# Altium PCB fcu.PcbDoc
Units mil, origin at the board's own origin, x right, y up, seen from the top; angles counter-clockwise.
Board outline 2000 x 2000 mil, 2 copper layers (Top Layer, Bottom Layer); 67 components, 84 nets, 346 pads, 154 vias.
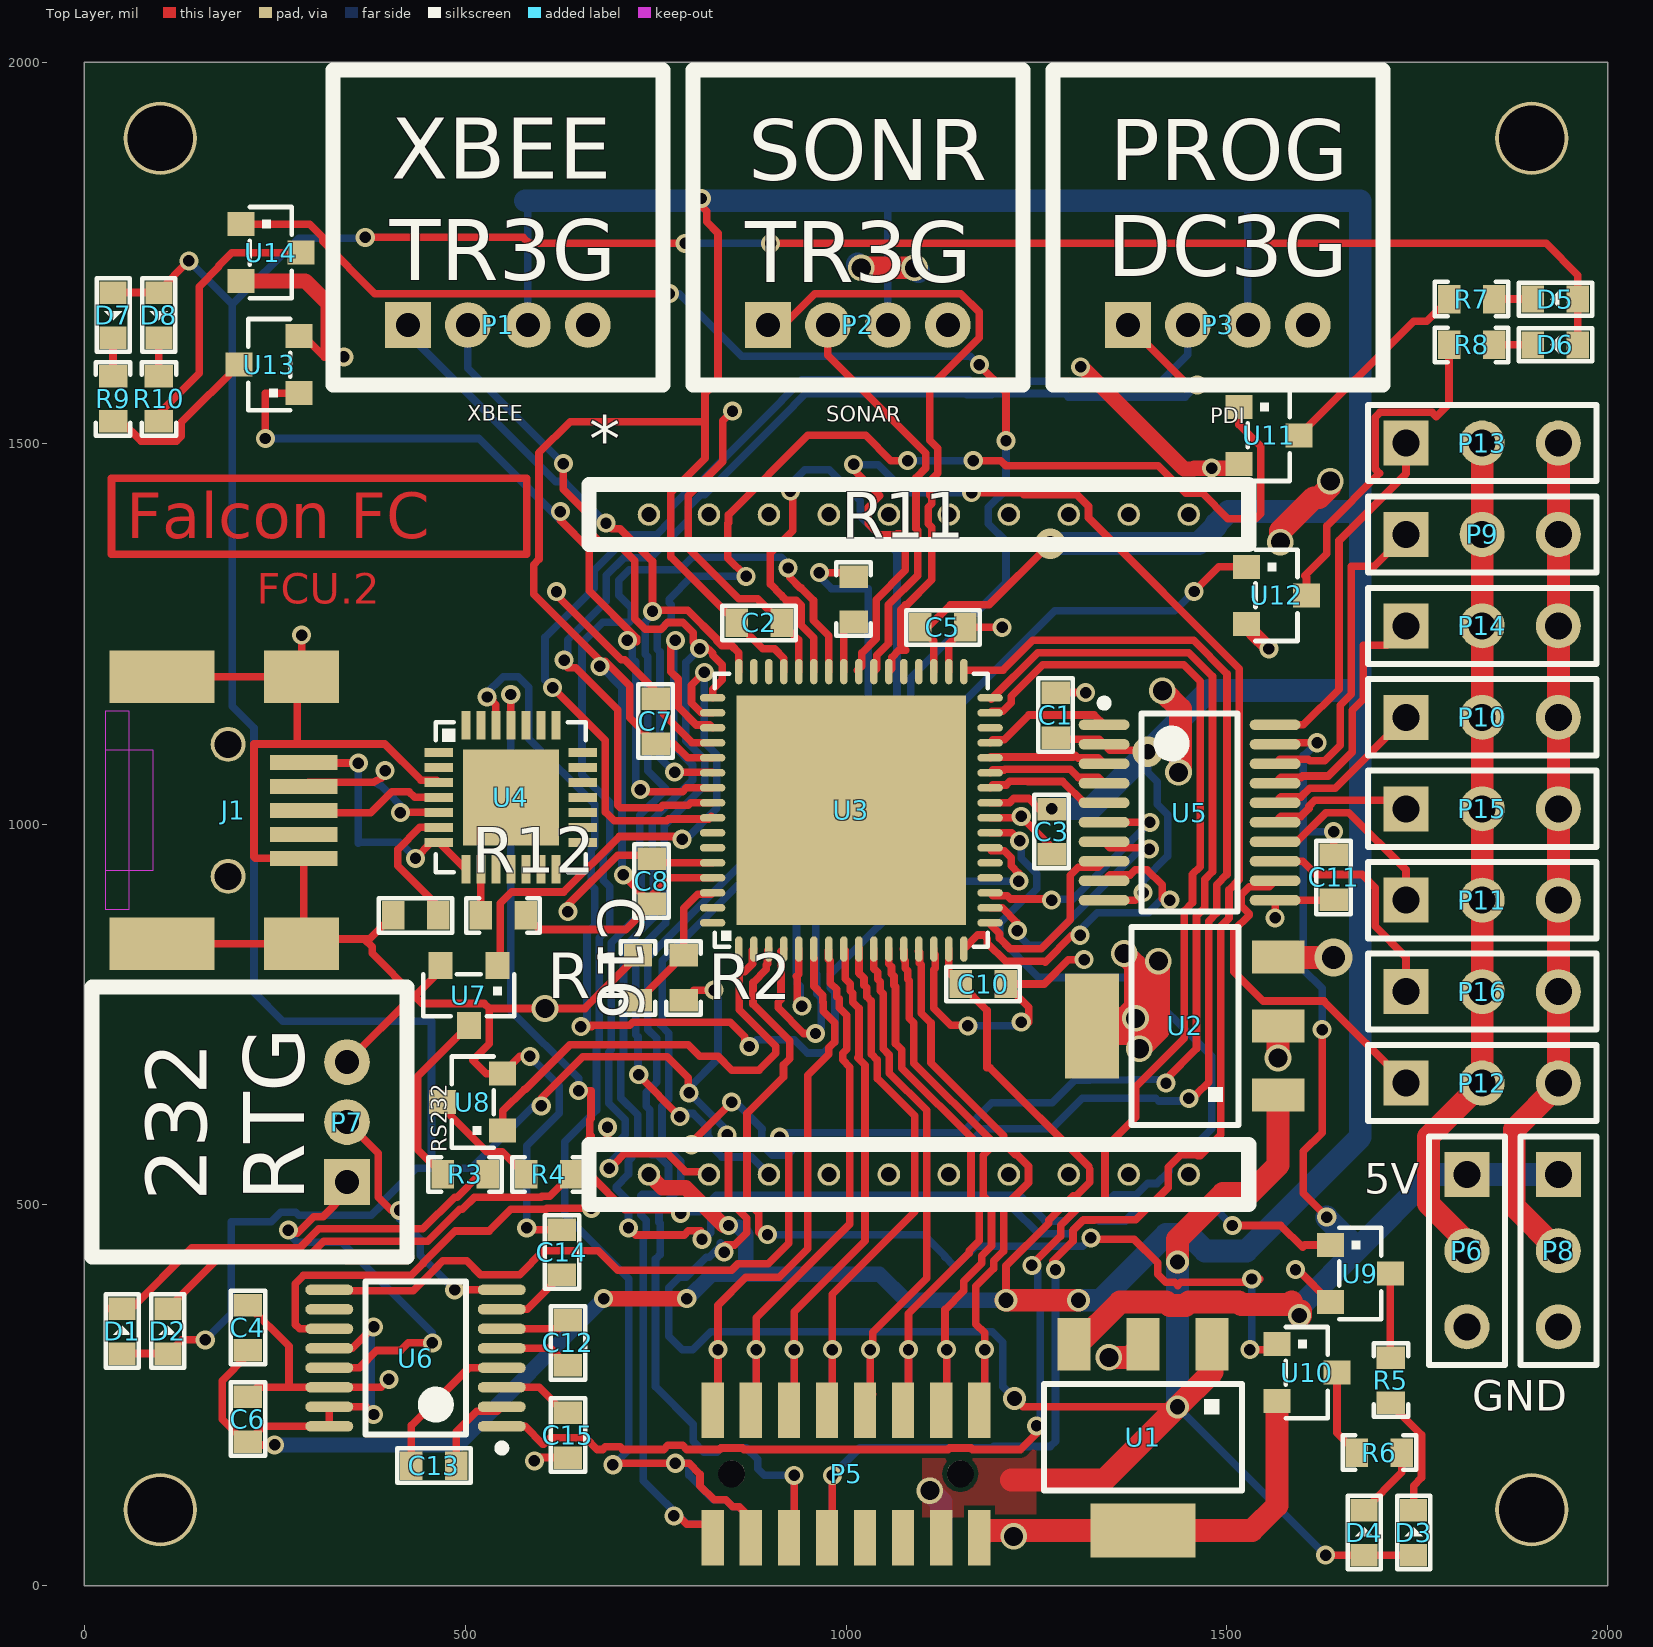
[diagram p0: Top Layer view]
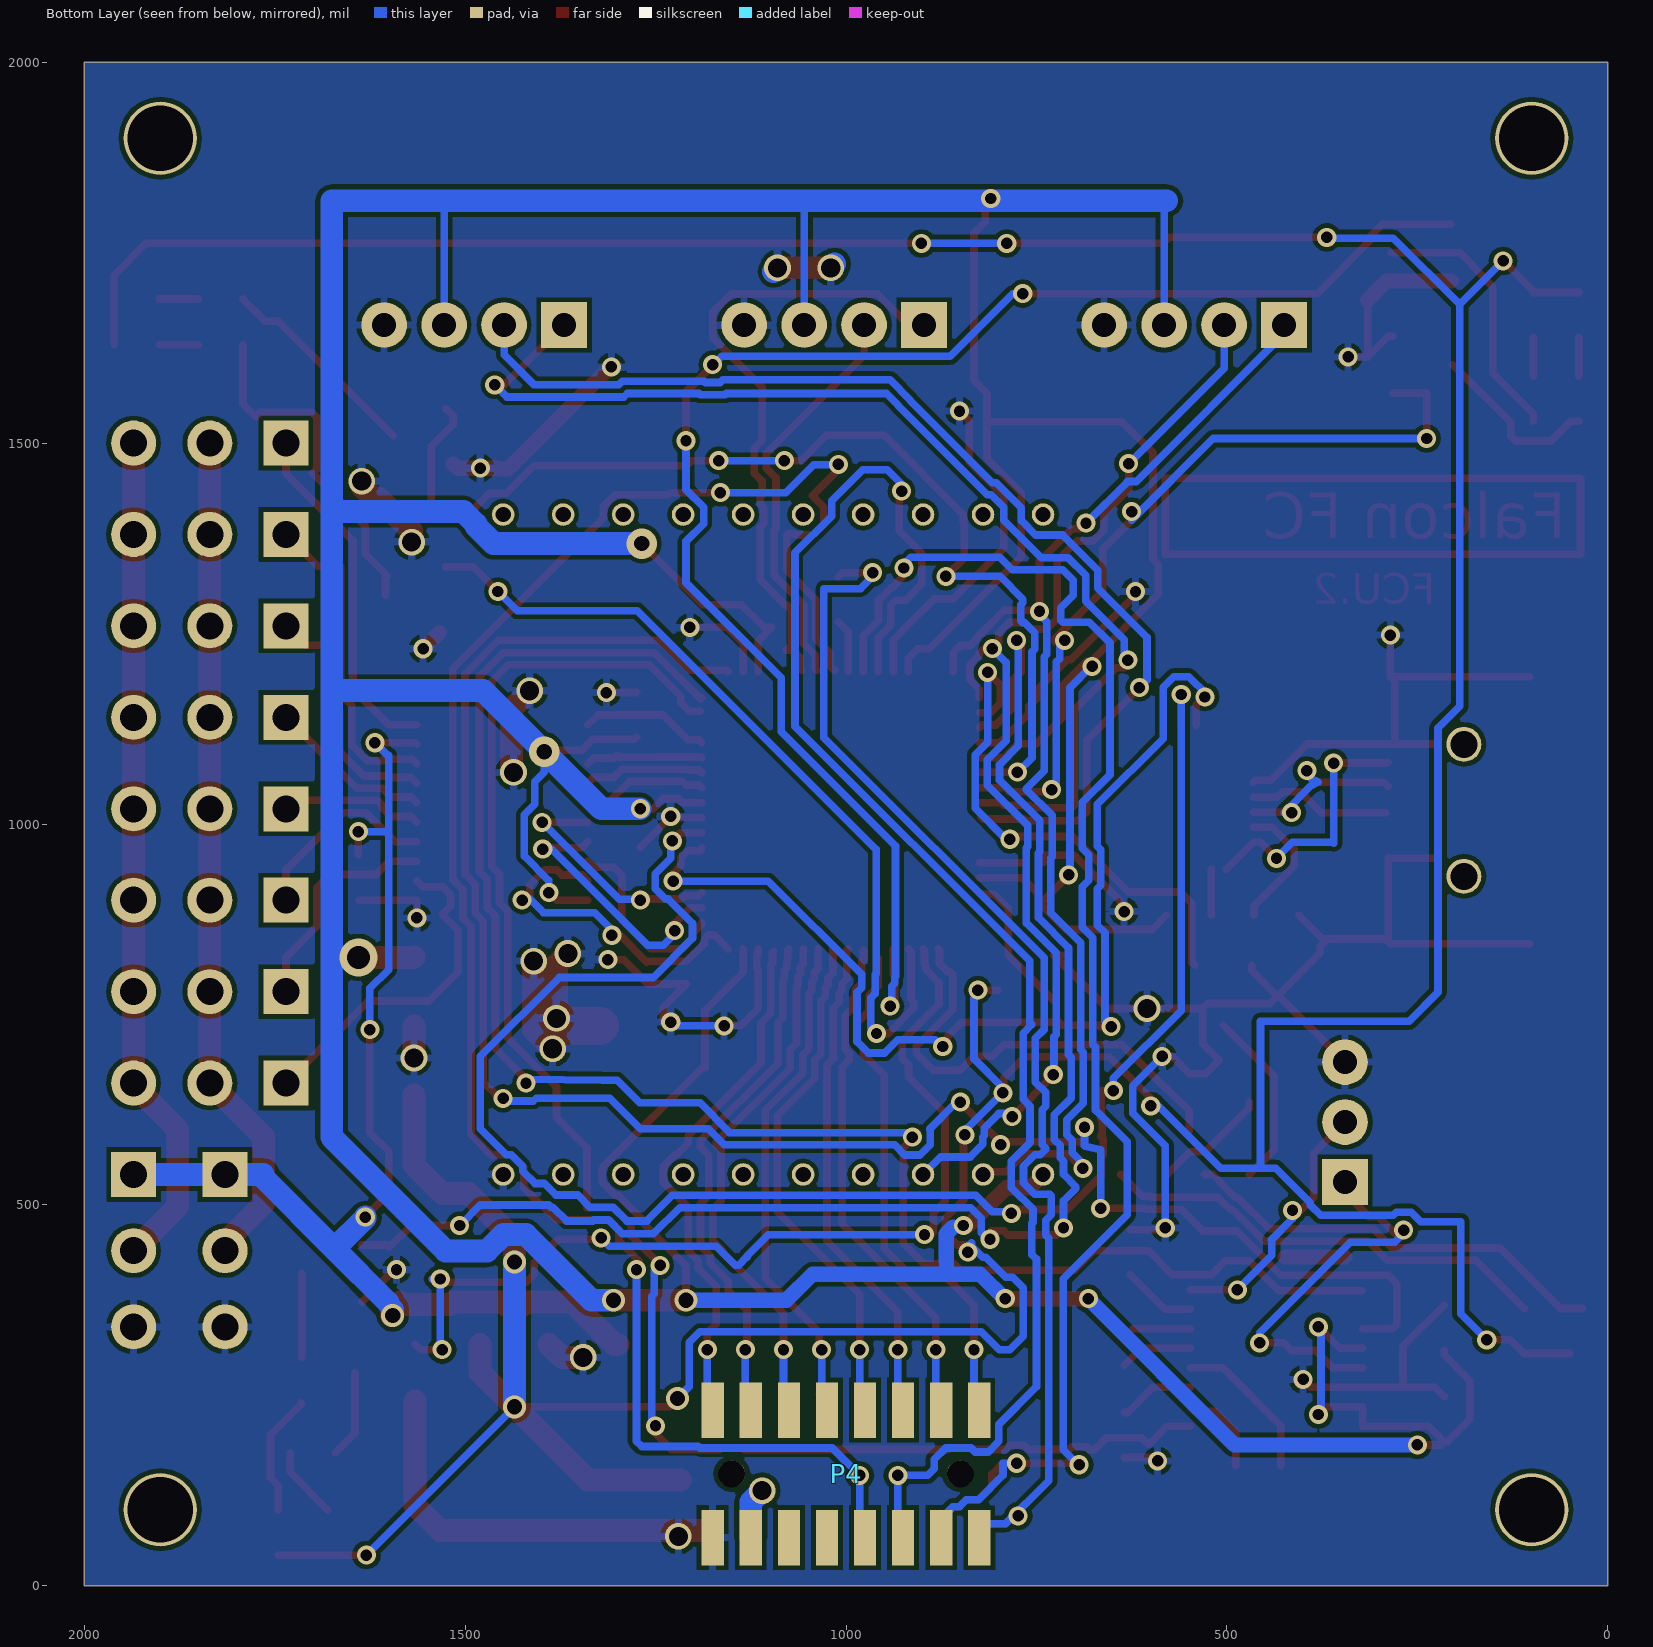
[diagram p1: Bottom Layer view, seen from below]

## Layer stack, top to bottom
Top Layer: signal copper 1.4
Dielectric: dielectric 12.6, FR-4, Dk 4.8
Bottom Layer: signal copper 1.4

## Board outline
0,0 2000,0 2000,2000 0,2000 2000,2000 2000,0 2000,2000 0,2000

## Design rules (kind name [scope] priority, off if disabled: settings)
Clearance [All] p1: gap=6
ComponentClearance [All] p1 off: gap=10 collisioncheckmode=3 verticalgap=0 showdistances=FALSE
DiffPairsRouting [All] p1: maxlimit=10 minlimit=10 mostfreqgap=10 maxuncoupledlength=500
HoleSize [All] p1: absolutevalues=TRUE maxlimit=100 minlimit=15 maxpercent=80.000 minpercent=20.000
MinimumSolderMaskSliver [All] p1 off: minsoldermaskwidth=10
PolygonConnect PolygonConnect_1 [NOT (InNet('VBAT')) vs NOT (InNet('VBAT'))] p1: connectstyle=Relief reliefconductorwidth=10 reliefentries=4 polygonreliefangle="90 Angle"
PolygonConnect [InNet('VBAT') vs InNet('VBAT')] p2: connectstyle=Direct reliefconductorwidth=10 reliefentries=4 polygonreliefangle="90 Angle"
RoutingVias [All] p1: holewidth=15 width=25 viastyle="Through Hole" minholewidth=15 minwidth=25 maxholewidth=100 maxwidth=200
SilkToSilkClearance [All] p1 off: silktosilkclearance=10
SilkscreenOverComponentPads [All] p1 off: minsilkscreentomaskgap=10
SolderMaskExpansion SolderMaskExpansion_1 [All] p1: expansion=4
Width [All] p1: maxlimit=100 minlimit=8 preferedwidth=10
22 further rules are at their usual default settings.

## Classes and differential pairs
differential pair D: +D_P -D_N

## Components (designator, comment, footprint, x,y, rotation, side; value= is the part's Value field where it differs from the comment)
* "XBee" XBee 1450,540 r90 top
C1 "Capacitor" "0603 (1608) RECT" 1275,1143 r90 top
C2 "Capacitor" "0603 (1608) RECT" 886,1264 r0 top
C3 "Capacitor" "0603 (1608) RECT" 1270,990 r270 top
C4 "Capacitor" "0603 (1608) RECT" 215,339 r90 top
C5 "Capacitor" "0603 (1608) RECT" 1127,1258 r0 top
C6 "Capacitor" "0603 (1608) RECT" 215,219 r90 top
C7 "Capacitor" "0603 (1608) RECT" 750,1135 r90 top
C8 "Capacitor" "0603 (1608) RECT" 745,925 r90 top
C10 "Capacitor" "0603 (1608) RECT" 1180,790 r0 top
C11 "Capacitor" "0603 (1608) RECT" 1640,930 r270 top
C12 "Capacitor" "0603 (1608) RECT" 635,319 r270 top
C13 "Capacitor" "0603 (1608) RECT" 459,158 r180 top
C14 "Capacitor" "0603 (1608) RECT" 627,438 r90 top
C15 "Capacitor" "0603 (1608) RECT" 635,198 r270 top
C16 "Capacitor" "0603 (1608) RECT" 435,880 r180 top
D1 "LED" "LED 0603 (1608)" 50,334.53 r180 top
D2 "LED" "LED 0603 (1608)" 110,334.53 r180 top
D3 "LED" "LED 0603 (1608)" 1745,70 r180 top
D4 "LED" "LED 0603 (1608)" 1680,70 r180 top
D5 "LED" "LED 0603 (1608)" 1931,1689 r270 top
D6 "LED" "LED 0603 (1608)" 1931,1629 r270 top
D7 "LED" "LED 0603 (1608)" 38,1668 r0 top
D8 "LED" "LED 0603 (1608)" 98,1668 r0 top
J1 "USB Mini-B" "USB MINI-B (PCB TAB)" 67,1018 r0 top
P1 "sherlock_ra_male_4" sherlock_ra_male_4 425,1655 r0 top
P2 "sherlock_ra_male_4" sherlock_ra_male_4 897.5,1655 r0 top
P3 "sherlock_ra_male_4" sherlock_ra_male_4 1370,1655 r0 top
P4 "2x8smd0.5female" S9007E-08-ND 1000,147 r0 bottom
P5 "2x8smd0.5male" S9007E-08-ND-noholes 1000,147 r0 top
P6 "Header 3" HDR1X3 1815,540 r270 top
P7 "sherlock_ra_male_3" sherlock_ra_male_3 345,530 r90 top
P8 "Header 3" HDR1X3 1935,540 r270 top
P9 "Header 3" HDR1X3 1735,1380 r0 top
P10 "Header 3" HDR1X3 1735,1140 r0 top
P11 "Header 3" HDR1X3 1735,900 r0 top
P12 "Header 3" HDR1X3 1735,660 r0 top
P13 "Header 3" HDR1X3 1735,1500 r0 top
P14 "Header 3" HDR1X3 1735,1260 r0 top
P15 "Header 3" HDR1X3 1735,1020 r0 top
P16 "Header 3" HDR1X3 1735,780 r0 top
R1 "Resistor" "0603 (1608) BRACKET" 727,798 r270 top
R2 "Resistor" "0603 (1608) BRACKET" 787,798 r270 top
R3 "Resistor" "0603 (1608) BRACKET" 500,540 r180 top
R4 "Resistor" "0603 (1608) BRACKET" 610,540 r180 top
R5 "Resistor" "0603 (1608) BRACKET" 1715,270 r90 top
R6 "Resistor" "0603 (1608) BRACKET" 1700,175 r180 top
R7 "Resistor" "0603 (1608) BRACKET" 1821,1689 r180 top
R8 "Resistor" "0603 (1608) BRACKET" 1821,1629 r180 top
R9 "Resistor" "0603 (1608) BRACKET" 38,1558 r270 top
R10 "Resistor" "0603 (1608) BRACKET" 98,1558 r270 top
R11 "Resistor" "0603 (1608) BRACKET" 1010,1295 r90 top
R12 "Resistor" "0603 (1608) BRACKET" 550,880 r180 top
U1 "UA78XX" SOT-223 1390,215 r180 top
U2 "UA78XX" SOT-223 1465,735 r90 top
U3 "ATXMEGAA3" QFN-64 1007,1018 r90 top
U4 "CP2102" "QFN28 5x5 SILABS" 560,1035 r0 top
U5 "TXB0108" TSSOP-20 1451,1015 r0 top
U6 "MAX3221" TSSOP-16 435,299 r180 top
U7 "RK7002B" SOT-23-RK7002B 505,775 r180 top
U8 "RK7002B" SOT-23-RK7002B 510,635 r90 top
U9 "RK7002B" SOT-23-RK7002B 1675,410 r270 top
U10 "RK7002B" SOT-23-RK7002B 1605,280 r270 top
U11 "RK7002B" SOT-23-RK7002B 1555,1510 r270 top
U12 "RK7002B" SOT-23-RK7002B 1565,1300 r270 top
U13 "RK7002B" SOT-23-RK7002B 243,1603 r90 top
U14 "RK7002B" SOT-23-RK7002B 245,1750 r270 top

## Footprints (in the part's own frame and the unit in brackets; to place one, negate y for a bottom-side part, rotate by r counter-clockwise, add the part's x,y. Pads: shape width x height; smd on the part's side, far side on the other; paste and mask are expansions set on the pad)
"0603 (1608) BRACKET" [mm] "Chip 2-Leads 0603 Bracket (1608)"
  rect 0.75x0.95 smd mask+0: 1(-0.75,0) 2(0.75,0)
  silkscreen extent -1.22,-0.58 1.22,0.58, body extent -0.77,-0.43 0.77,0.43, height 0.55
"0603 (1608) RECT" [mm] "Chip 2-Leads 0603 Rectangular Silk Screen (1608)"
  rect 0.75x0.95 smd mask+0: 1(-0.75,0) 2(0.75,0)
  silkscreen extent -1.22,-0.58 1.22,0.58, body extent -0.77,-0.43 0.77,0.43, height 0.55
HDR1X3 [mm] "Connector; Header; 3 Position"
  rect 1.5x1.5 hole 0.9: 1(0,0)
  round 1.5 hole 0.9: 2(2.54,0) 3(5.08,0)
  silkscreen extent -1.27,-1.27 6.35,1.27
"LED 0603 (1608)" [mm] "LED Chip 2-Leads 0603 Rectangular Silk Screen (1608)"
  rect 0.9x0.75 smd mask+0: 1(0,0.75) 2(0,-0.75)
  silkscreen extent -0.55,-1.22 0.55,1.22
"QFN28 5x5 SILABS" [mm] "QFN-28 5mm x 5mm Body SiLabs CP2102"
  rect 0.95x0.3 smd paste-0.03 mask+0.012: 1(-2.4,1.5) 2(-2.4,1) 3(-2.4,0.5) 4(-2.4,0) 5(-2.4,-0.5) 6(-2.4,-1) 7(-2.4,-1.5) 15(2.4,-1.5) 16(2.4,-1) 17(2.4,-0.5) 18(2.4,0) 19(2.4,0.5) 20(2.4,1) 21(2.4,1.5)
  rect 0.3x0.95 smd paste-0.03 mask+0.012: 8(-1.5,-2.4) 9(-1,-2.4) 10(-0.5,-2.4) 11(0,-2.4) 12(0.5,-2.4) 13(1,-2.4) 14(1.5,-2.4) 22(1.5,2.4) 23(1,2.4) 24(0.5,2.4) 25(0,2.4) 26(-0.5,2.4) 27(-1,2.4) 28(-1.5,2.4)
  rect 3.2x3.2 smd paste-10 mask+0.1: 29(0,0)
  silkscreen extent -2.5,-2.5 2.5,2.5, body extent -2.5,-2.5 2.5,2.5, height 1
QFN-64 [mm] "64M2, 64-pad, 9 x 9 x 1.0 mm Body, Lead Pitch 0.50mm 7.65mm Exposed Pad"
  oval 0.85x0.25 smd paste-0.02 mask+0.02: 1(-4.625,3.75) 2(-4.625,3.25) 3(-4.625,2.75) 4(-4.625,2.25) 5(-4.625,1.75) 6(-4.625,1.25) 7(-4.625,0.75) 8(-4.625,0.25) 9(-4.625,-0.25) 10(-4.625,-0.75) 11(-4.625,-1.25) 12(-4.625,-1.75) 13(-4.625,-2.25) 14(-4.625,-2.75) 15(-4.625,-3.25) 16(-4.625,-3.75) 33(4.625,-3.75) 34(4.625,-3.25) 35(4.625,-2.75) 36(4.625,-2.25) 37(4.625,-1.75) 38(4.625,-1.25) 39(4.625,-0.75) 40(4.625,-0.25) 41(4.625,0.25) 42(4.625,0.75) 43(4.625,1.25) 44(4.625,1.75) 45(4.625,2.25) 46(4.625,2.75) 47(4.625,3.25) 48(4.625,3.75)
  oval 0.25x0.85 smd paste-0.02 mask+0.02: 17(-3.75,-4.625) 18(-3.25,-4.625) 19(-2.75,-4.625) 20(-2.25,-4.625) 21(-1.75,-4.625) 22(-1.25,-4.625) 23(-0.75,-4.625) 24(-0.25,-4.625) 25(0.25,-4.625) 26(0.75,-4.625) 27(1.25,-4.625) 28(1.75,-4.625) 29(2.25,-4.625) 30(2.75,-4.625) 31(3.25,-4.625) 32(3.75,-4.625) 49(3.75,4.625) 50(3.25,4.625) 51(2.75,4.625) 52(2.25,4.625) 53(1.75,4.625) 54(1.25,4.625) 55(0.75,4.625) 56(0.25,4.625) 57(-0.25,4.625) 58(-0.75,4.625) 59(-1.25,4.625) 60(-1.75,4.625) 61(-2.25,4.625) 62(-2.75,4.625) 63(-3.25,4.625) 64(-3.75,4.625)
  rect 7.65x7.65 smd paste-10 mask+0.051: 65(0,0)
  silkscreen extent -4.55,-4.55 4.55,4.55, body extent -4.55,-4.55 4.55,4.55, height 1
S9007E-08-ND [mm] "16 0.05\" smd header - female"
  round 0.889 hole 0.9 unplated: 0(-3.81,0) 0(3.81,0)
  rect 0.74x1.85 smd: 1(-4.445,2.125) 2(-4.445,-2.125) 3(-3.175,2.125) 4(-3.175,-2.125) 5(-1.905,2.125) 6(-1.905,-2.125) 7(-0.635,2.125) 8(-0.635,-2.125) 9(0.635,2.125) 10(0.635,-2.125) 11(1.905,2.125) 12(1.905,-2.125) 13(3.175,2.125) 14(3.175,-2.125) 15(4.445,2.125) 16(4.445,-2.125)
S9007E-08-ND-noholes [mm] "16 0.05\" smd header - female"
  rect 0.74x1.85 smd: 1(-4.445,2.125) 2(-4.445,-2.125) 3(-3.175,2.125) 4(-3.175,-2.125) 5(-1.905,2.125) 6(-1.905,-2.125) 7(-0.635,2.125) 8(-0.635,-2.125) 9(0.635,2.125) 10(0.635,-2.125) 11(1.905,2.125) 12(1.905,-2.125) 13(3.175,2.125) 14(3.175,-2.125) 15(4.445,2.125) 16(4.445,-2.125)
sherlock_ra_male_3 [mil]
  rect 60x60 hole 31.5: 1(0,0)
  round 60 hole 31.5: 2(78.74,0) 3(157.48,0)
  Top Layer lines w20: -98.43,0 -98.43,-78.74
  silkscreen extent -98,-79 256,335
sherlock_ra_male_4 [mil]
  rect 60x60 hole 31.5: 1(0,0)
  round 60 hole 31.5: 2(78.74,0) 3(157.48,0) 4(236.22,0)
  silkscreen extent -98,-79 335,335
SOT-23-RK7002B [mm] "SOT-23; 3 Leads; Body 3.0 x 2.6 mm, inc. leads (LxW max)"
  rect 0.8x0.9 smd paste-0.025 mask+0: 1(0.95,-1) 2(-0.95,-1) 3(0,1)
  silkscreen extent -1.52,-0.7 1.52,0.7, body extent -1.5,-1.25 1.5,1.25, height 1.1
SOT-223 [mm] "SOT-223"
  rect 1.1x1.75 smd paste-0.05 mask+0.025: 1(-2.3,-2.592) 2(0,-2.592) 3(2.3,-2.592)
  rect 3.5x1.8 smd paste-0.05 mask+0.025: 4(0,3.608)
  silkscreen extent -3.3,-1.27 3.3,2.29, body extent -3.25,-3.02 3.25,3.94, height 1.65
TSSOP-16 [mm]
  oval 1.6x0.35 smd: 1(-2.875,2.275) 2(-2.875,1.625) 3(-2.875,0.975) 4(-2.875,0.325) 5(-2.875,-0.325) 6(-2.875,-0.975) 7(-2.875,-1.625) 8(-2.875,-2.275) 9(2.875,-2.275) 10(2.875,-1.625) 11(2.875,-0.975) 12(2.875,-0.325) 13(2.875,0.325) 14(2.875,0.975) 15(2.875,1.625) 16(2.875,2.275)
  silkscreen extent -3,-2.55 1.68,3.12, body extent -2.25,-2.55 2.25,2.55, height 1.1
TSSOP-20 [mm]
  oval 1.7x0.35 smd: 1(-2.85,2.925) 2(-2.85,2.275) 3(-2.85,1.625) 4(-2.85,0.975) 5(-2.85,0.325) 6(-2.85,-0.325) 7(-2.85,-0.975) 8(-2.85,-1.625) 9(-2.85,-2.275) 10(-2.85,-2.925) 11(2.85,-2.925) 12(2.85,-2.275) 13(2.85,-1.625) 14(2.85,-0.975) 15(2.85,-0.325) 16(2.85,0.325) 17(2.85,0.975) 18(2.85,1.625) 19(2.85,2.275) 20(2.85,2.925)
  silkscreen extent -2.97,-3.3 1.6,3.77, body extent -2.25,-3.3 2.25,3.3, height 1.2
"USB MINI-B (PCB TAB)" [mm] "USB Mini B with PCB TAB (Fits Kobiconn, Tyco, Molex)"
  rect 2.25x0.5 smd paste-0.075 mask+0.025: D+(5.625,0) D-(5.625,0.8) GND(5.625,-1.6) ID(5.625,-0.8) VBUS(5.625,1.6)
  round 1.168 hole 0.9 unplated mask+0.025: MH(3.1,-2.2) MH(3.1,2.2)
  rect 3.5x1.75 smd paste-0.075 mask+0: SHLD(0.9,-4.45) SHLD(0.9,4.45)
  rect 2.5x1.75 smd paste-0.075 mask+0: SHLD(5.55,-4.45) SHLD(5.55,4.45)
  Top Layer keep-out region: -1,-2 0.6,-2 0.6,2 -1,2
  Top Layer keep-out region: -1,-3.3 -0.2,-3.3 -0.2,3.3 -1,3.3
  body extent -2.8,-4.95 6.2,4.95, height 3.93
XBee [mm]
  round 0.75 hole 0.51: 1(0,18) 2(0,16) 3(0,14) 4(0,12) 5(0,10) 6(0,8) 7(0,6) 8(0,4) 9(0,2) 10(0,0) 11(22,0) 12(22,2) 13(22,4) 14(22,6) 15(22,8) 16(22,10) 17(22,12) 18(22,14) 19.(22,16) 20(22,18)
  silkscreen extent -1,-2 23,20

## Part data
P6 P8 P9 P10 P11 P12 P13 P14 P15 P16: "Header, 3-Pin"

## Free pads (board coordinates)
  round 96 hole 86: 1(100,100) 2(1900,100) 3(1900,1900) 4(100,1900)

## Via types
v1: diameter 25, hole 15, Top Layer to Bottom Layer, tented both sides, 80 vias
v2: diameter 25, hole 15, Top Layer to Bottom Layer, 50 vias
v3: diameter 35, hole 25, Top Layer to Bottom Layer, 15 vias
v4: diameter 30, hole 20, Top Layer to Bottom Layer, 5 vias
v5: diameter 40, hole 20, Top Layer to Bottom Layer, tented both sides, 2 vias
v6: diameter 50, hole 30, Top Layer to Bottom Layer, 1 vias
v7: diameter 30, hole 20, Top Layer to Bottom Layer, tented both sides, 1 vias

## Nets (pads, with @x,y where several pads share a name; then routed paths per layer and width w, separated by ;. In a path a pad name is that pad's centre, name@x,y a point inside that pad or via, vN(x,y) a via of type N, cw(c..) or ccw(c..) an arc to the next point about the centre after c; other vN are vias at no path point)
3.3V: *.1 C1.1 C2.1 C3.1 C4.1 C5.1 C6.1 C7.1 C8.1 C10.1 P1.3 P2.3 P3.3 R12.1 U2.3 U3.15 U3.25 U3.35 U3.45 U3.53 U3.61 U5.2 U5.10 U6.12 U6.15 U6.16 | length 9619.9
  Top Layer w10: C6.1@210.59,189.47 181.3,218.76 181.3,269.5 215,303.21 C4.1 ; v1(250,185) 219.47,185 C6.1 234.96,209.43 U6.16 U6.15 369.98,235.02 v1(380,225) ; U6.12 351.8,311.8 v1(380,340) ; R12.1 598.03,861.5 711.03,861.5 C8.1 v2@707.52,932.95 ; v2@677.38,1214.38 590,1301.77 590,1340.37 597,1347.37 597,1487 638,1528 814,1528 ; v2@683.8,1213.8 716.19,1181.4 716.19,1139.28 C7.1 773.59,1105.47 792.16,1086.9 U3.53 ; C8.1@747,908.47 747.97,908.47 768.91,929.42 U3.61 ; v1@810,1811.47 817,1804.47 817,1790.56 832,1775.56 832,1582.44 815,1565.44 815,1480 770,1435 770,1350.47 C2.1 890.65,1229.82 906.16,1229.82 918.42,1217.56 U3.45 ; U3.35 1115.27,1240.2 C5.1 1107.51,1258 1137.21,1287.7 1187.7,1287.7 v5(1268,1368) ; U3.15 1134.95,805.52 C10.1 1185,755.47 1185,680 ; 1188.96,680 1318.28,550.67 ; U3.25 1214.61,1027.84 1220.27,1033.5 1239.73,1033.5 1253.71,1019.53 C3.1 ; v7@1210,387.37 1210,420 1265.91,475.91 ; 1265.91,479.75 1298.42,512.26 ; C1.1 1277.47,1111 1332.36,1111 U5.2 1346.5,1096.87 v5@1393.99,1096.87 ; 1302.26,512.26 1320,530 1320,546.47 ; U5.10 1379.84,899.84
  Top Layer w20: v1(682,377) v1(791,377) ; *.1 758.84,522.5 789.81,522.5 839.31,473 v2(846,473)
  Top Layer w30: v7(1210,375) v4(1305,375) ; U2.3 1567.6,825 v6(1640,825)
  Bottom Layer w10: v1(380,225) 376.5,228.5 376.5,336.5 v1(380,340) ; P1.3 582.48,1814.52 ; v2@677.5,1207.5 706,1179 v2@706,935.03 ; P2.3 1054.98,1817.98 ; v1(1390,910) 1390,925.77 1422.3,958.06 1422.3,1011.94 1408.53,1025.7 1408.53,1055.47 1396,1068 v5(1396,1094.86) ; P3.3 1527.48,1816.52
  Bottom Layer w20: v1(250,185) 490,185 v1(682,377) ; v1@791.5,376.5 824,409 868,409 ; v2@844,471 v2(846,473) ; 859.31,471 868.5,461.81 868.5,426.19 868,425.69 868,409 ; v7(1210,375) 1077.98,375 1043.98,409 868,409
  Bottom Layer w30: 579,1818 1675,1818 1675,1410 ; v5(1268,1368) 1462.44,1368 1485.76,1391.33 ; v1(1270,1020) 1321.14,1020 v5(1396,1094.86) 1476.14,1175 1675,1175 ; v4(1305,375) 1334.09,375 1420.09,461 1449.91,461 1471.41,439.5 1525.5,439.5 1675,589 1675,825 ; 1485.76,1393.76 1502,1410 1675,1410 ; v6(1640,825) 1675,825 ; 1675,825 1675,1175 ; 1675,1175 1675,1410
  other v1: 810,1821
  other v2: 707.8,933.23 677,1207
5V: C11.1 P6.1 P8.1 U1.3 U5.19 | length 1584.6
  Top Layer w10: U5.19 1565.3,1106.66 v2(1618.42,1106.66) ; v2(1625,730) 1625,595 1600.3,570.3 1600.3,515.3 1631,484.6 v1(1631,484) ; C11.1 v2(1640,990)
  Top Layer w30: U1.3 1304.2,317.05 1359.65,372.5 1420.35,372.5 1424.85,368 1445.7,368 1450.2,372.5 1515.48,372.5 1518.7,369.28 1581.79,369.28 1585,372.5 ; v4(1595,355) 1596.91,355 v4@1596.91,360.58
  Bottom Layer w10: v2(1618.42,1106.66) 1601.77,1090 1600.3,1090 1600.3,990 ; v2(1625,730) 1625,784.3 1600.3,809 1600.3,990 ; v2(1640,990) 1600.3,990
  Bottom Layer w30: v4(1595,355) v4@1595,362.5 ; 1601,372 1671.5,442.5 ; v1(1631,484) 1631,483 1671.5,442.5 ; P8.1 P6.1 1765,540 1765,536 1671.5,442.5
D_N: J1.D- U4.5 | length 261.6
  Top Layer w10: J1.D- 293.96,1055 380,1055 390,1060 395,1065 v2(395,1070) ; v2(415,1015) 425,1015 425.32,1015.32 U4.5
  Bottom Layer w10: v2(395,1070) 395,1065 390,1060 380,1055 390,1050 425,1015 v2(415,1015)
D_P: J1.D+ U4.4 | length 188.6
  Top Layer w10: J1.D+@291.46,1015 376.11,1015 403.61,1042.5 426.39,1042.5 433.89,1035 U4.4
GND: *.10 C1.2 C2.2 C3.2 C4.2 C5.2 C6.2 C7.2 C8.2 C10.2 C11.2 C14.2 C15.2 C16.2 J1.GND J1.SHLD P1.4 P2.4 P3.4 P4.15 P5.16 P6.3 P7.3 P8.3 R1.1 U1.2 U1.4 U2.2 U2.4 U3.14 U3.24 U3.34 U3.44 U3.52 U3.60 U4.3 U5.11 U6.14 U7.1 U8.1 U9.1 U10.1 U11.1 U12.1 U13.1 U14.1 | length 6266.1
  Top Layer w10: J1.SHLD@102.43,842.8 285.5,842.8 291.7,849 368,849 ; J1.SHLD@102.43,1193.2 J1.SHLD@285.5,1193.2 ; C6.2 227.09,260.61 269,260.61 ; C4.2 269,314.53 269,260.61 ; U13.1 288,1640.4 315.4,1613 ; v1(285.5,1248) J1.SHLD@285.5,1193.2 ; J1.SHLD@288.46,845.76 J1.GND 224.99,955.01 223.05,956.95 223.05,1105 280,1105 ; 315.4,1687.57 315.4,1613 ; v1(341,1613) 315.4,1613 ; P7.3 431.71,774.19 434.19,774.19 ; v1(400,271) 389.61,260.61 U6.14 269,260.61 ; C16.2 374.47,849 368,849 ; U4.3 462.73,1057.46 442.25,1057.46 394.72,1105 280,1105 ; U7.1 467.6,807.6 434.19,774.19 ; v1(581,470) 581,472 585.47,467.53 C14.2 ; v2(585,695) 571.97,695 U8.1 527.6,672.4 510,690 531.75,711.75 531.75,757.9 ; v1@595.47,168.47 C15.2 C15.2@622.47,168.47 ; v2(620,1305) 620,1300.77 705.27,1215.5 709.5,1215.5 750,1175 C7.2 760,1154.53 760,1144.52 797.94,1106.58 U3.52 ; v2(635,885) 635,893.67 700.19,958.86 740.67,958.86 C8.2 C8.2@740.47,950 ; R1.1@717.47,827.53 R1.1 657.38,757.9 531.75,757.9 ; 765.43,949.1 U3.60 ; v1(851,1542) 838,1529 838,1475.79 792.98,1430.76 792.98,1362.02 859.3,1295.7 883.83,1295.7 C2.2 938.1,1241.43 U3.44 ; 1115,808.88 1115,758.37 1137.47,735.9 v1@1159.1,735.9 ; U3.14 1115.27,830.14 1117.03,828.38 1117.03,810.91 ; U3.34 1134.95,1236.43 C5.2 v1(1205,1258) ; U3.24 1231.08,1008.16 C3.2@1270,969.23 ; v1(1230,740) 1240,740 1240,759.53 C10.2 1260,790 1292,822 v1(1312.47,822) ; C1.2 v1(1314.53,1172.53) ; U2.4@1317.95,740 U2.4 ; v2(1563.2,876.8) U5.11 ; U5.11@1565.47,897.57 U5.11 ; v2@1593.23,415 U9.1 ; C11.2@1639.68,899.84 U5.11 ; 280,1105 280,1187.69 J1.SHLD@285.5,1193.2 ; 368,849 378,839 378,830.37 434.19,774.19 ; 434.19,774.19 444.03,764.35 525.3,764.35 531.75,757.9
  Top Layer w20: U14.1 290.37,1712.6 315.4,1687.57 ; v1(1308,1600) 1309.7,1600 1443.7,1466 1456,1466 1457,1467 v1(1480,1467) 1510.03,1467 U11.1 ; U12.1@1533.63,1251.37 v2(1555,1230)
  Top Layer w30: v3(1020,1730) v3(1090,1730) ; P5.16 1184.61,72.95 U1.4 1532.95,72.95 1565.63,105.63 U10.1 ; v3(1345,300) 1372.95,300 U1.2 ; v3(1365,830) 1380,815 v3(1380,744.99) ; v3(1384.99,705) 1410,730.01 v3(1410,820) ; v3(1415.11,1174.89) 1439,1151 1439,1070.3 v3(1436.5,1067.8) ; v3(1567.05,692.95) U2.2 ; v3(1570,1370) 1570,1384.41 1613.84,1428.25 1620.79,1428.25 1635.59,1443.05 v3(1635.59,1450)
  Top Layer w50: U2.4 1370.01,735 v3(1380,744.99)
  Bottom Layer w10: v1(581,470) 581,577.77 623.5,620.27 623.5,656.5 v2(585,695) ; v1@846,1547 v1(851,1542) ; v1(1160,735) v1@1225,735
  Bottom Layer w30: v3@1015,1735 v3(1020,1730) ; v3(1090,1730) v3@1095,1725 ; v3@1635,1450.59 v3(1635.59,1450)
  other v1: 591,164 1230,1010
  other v2: 1590,415
  other v3: 1220,65 605,757.9
LED0: U3.2 U8.2 | length 610.1
  Top Layer w10: U8.2 549.37,623.38 578.09,652.1 579.36,652.1 637.76,710.5 792.96,710.5 808.2,695.26 832,695.26 850.26,677 885.74,677 908,699.26 908,708.03 860,756.03 860,803 863.18,806.18 866.79,806.18 877.28,816.68 877.28,834.15 U3.2
LED1: U3.3 U10.2 | length 1322.7
  Top Layer w10: v1(897,461) 889,461 885.5,464.5 885.5,489.36 870,504.86 870,620 918,668 918,683.8 926,691.8 ; U3.3 897.05,834.23 897.05,828.46 896.97,828.38 896.97,816.68 895.28,814.99 895.28,809.22 878,791.94 878,763.48 926,715.48 926,691.8 ; 920.73,686.53 926,691.8 ; v1@1322.93,455.23 1378,455.23 1409,424.23 1409,409.23 1419.73,398.5 1431.12,398.5 1435.28,394.34 1439.43,398.5 1538.5,398.5 1542.78,402.78 v2(1532.57,402.78) ; v2(1530,310) 1558.23,310 U10.2
  Bottom Layer w10: v1(897,461) 1101.91,461 1130,432.91 1130,431.74 1140.74,421 1145.26,421 1170.26,446 1310.65,446 v1(1321.41,456.76) v1@1325.65,461 ; v2(1530,310) 1532.57,312.57 v2(1532.57,402.78) v2@1542.78,402.78
LED2: U3.4 U12.2 | length 1097.3
  Top Layer w10: U3.4@918,835.91 914.73,832.65 914.73,769.79 911,766.06 911,758.77 944.77,725 v1(960,725) ; v1(1456.81,1305.19) 1489.03,1337.4 U12.2
  Bottom Layer w10: 960.5,803.56 960.5,966.5 1274,1280 1431.63,1280 v1(1456.81,1305.19) ; 961.5,802.56 961.5,777.56 967.5,771.56 v1@967.5,732.5
LED3: U3.5 U14.2 | length 2123.7
  Top Layer w10: U14.2 295.99,1787.4 313.09,1770.3 313.09,1764.68 381.77,1696 v1(768,1696) ; v1@936,763 936,791 ; 936,792 936,791 ; U3.5 938.1,803.1 935,800 936,799 936,791 ; v1(1175,1603) 1175,1602 1210,1567 v1(1210,1503)
  Bottom Layer w10: v1(768,1696) 780.94,1696 862.94,1614 1163,1614 1175,1602 v1(1175,1603) ; 936,792 936,791 ; v1(942,761) 940,759 940,787 936,791 ; v1(1210,1503) 1210,1438.99 1186.68,1415.67 1186.68,1394.33 1210,1371.01 1210,1316.74 1085,1191.74 1085,1121.09 935,971.09 935,800 936,799 936,791
LED4: U3.50 U7.2 | length 687.2
  Top Layer w10: U7.2 546.24,818.2 546.24,895.73 561.32,910.81 629.52,910.81 702.23,983.53 781.47,983.53 v2(785,980) ; v2(814,1199) 797.18,1182.18 797.18,1159.04 810.27,1145.95 U3.50
  Bottom Layer w10: v2(785,980) 790,980 830.5,1020.5 830.5,1090.99 814,1107.49 v2(814,1199)
LED5: U3.51 U9.2 | length 2024.5
  Top Layer w10: v2(714.5,470) 724,460.5 787.73,460.5 793.23,466 809,466 809,455 v2(811,455) ; v2(776,1241) 777,1240 775,1240 770,1235 770,1199.99 779.7,1190.29 779.7,1153.9 803.64,1129.95 821.23,1129.95 U3.51 ; v2(1507,473) 1570.63,473 1599.26,444.37 ; 1602.29,447.4 U9.2
  Bottom Layer w10: v2(714.5,470) 714.5,505.3 698.24,521.56 698.24,524 714.5,540.27 714.5,557.56 719,562.06 719,578.14 726.5,585.64 726.5,618.36 704.5,640.36 704.5,693.91 708,697.41 708,837.43 747.3,876.73 747.3,961.84 745.5,963.64 745.5,1004.64 798.5,1057.64 798.5,1077.73 773.68,1102.55 773.68,1238.68 v2(776,1241) ; v2(811,455) 809,455 809.5,455.5 814.73,455.5 822.5,463.27 822.5,482.73 836.27,496.5 1218.3,496.5 1252.8,462 1293.42,462 1311.67,480.26 1331.14,480.26 1332.4,479 1366.77,479 1384.86,497.09 1387.42,497.09 1390.32,500 1480,500 v2(1507,473)
LED6: U3.54 U11.2 | length 1443.7
  Top Layer w10: v1(775,1068) 824.13,1068 U3.54 ; v2(868.83,1325) 845,1348.83 845,1394.63 845.84,1395.47 845.84,1405.84 950,1510 1025.74,1510 1058.74,1477 v1(1081,1477) ; v1(1167,1477) 1203,1477 1210,1470 1410,1470 1446,1434 1468,1434 1501.15,1400.85 1537.9,1400.85 1544.35,1407.29 1544.35,1495.65 1515.63,1524.37 1515.63,1535.63 U11.2@1525,1545
  Bottom Layer w10: v1(775,1068) 755.81,1087.19 755.81,1225.96 752.5,1229.27 752.5,1250.73 766.27,1264.5 768.27,1264.5 770.5,1266.73 770.5,1287.73 767.93,1290.3 767.93,1295.13 797.8,1325 v2(868.83,1325) ; v1(1081,1477) v1(1167,1477)
LED7: U3.55 U13.2 | length 1098
  Top Layer w10: v1(238,1506) 238,1565 238.6,1565.6 U13.2 ; v1(625,1410) 625,1399 663.18,1360.82 663.18,1305.96 725,1244.14 725,1239 716,1239 714,1241 v1(713,1241) ; v1(730,1045) 735,1050 728.94,1050 726.47,1047.53 731.5,1042.5 785.56,1042.5 790.59,1047.53 U3.55
  Bottom Layer w10: v1@234,1506 v1(238,1506) 518,1506 625,1399 v1(625,1410) ; v1(713,1241) 714,1241 719.5,1235.5 719.5,1217.01 723.81,1212.71 723.81,1051.19 v1(730,1045)
MISO: P4.3 P5.4 U3.42 | length 2105
  Top Layer w10: v1@694,161 v1(776,161) 794,161 808.31,146.69 808.31,131.69 827,113 842,113 851.23,103.77 859.57,103.77 P5.4@882,81.34 ; v1@926,1338 926,1324 940.3,1309.7 941.47,1309.7 957.29,1293.88 957.29,1267.49 977.47,1247.31 U3.42
  Bottom Layer w10: v1@695.31,159.12 715,178.81 715,403.35 631,487.35 631,582.77 672.5,624.27 672.5,707.17 676,710.67 676,850.68 690,864.68 690,917.8 681.5,926.3 681.5,959.73 690,968.23 690,1028.32 653.5,1064.82 653.5,1237.83 680.67,1265 715.18,1265 718,1267.82 718,1283.77 701.5,1300.27 701.5,1319.73 715.27,1333.5 781.73,1333.5 798.23,1350 915,1350 924,1341 v1(924,1336) ; v1(776,161) 794,161 ; 794,160.88 794,145 826,113 841.88,113 851.11,103.77 859.57,103.77 882,81.34 P4.3@882,61.97
  other v1: 694,159
MOSI: P4.1 P5.2 R11.2 | length 1662.9
  Top Layer w10: v1@778,94 791,81 831.66,81 P5.2@832,81.34 ; v2(965,1330) 1004.53,1330 R11.2
  Bottom Layer w10: P4.1@832,81.34 790.66,81.34 734,138 734,456.27 738,460.27 738,479.73 730.5,487.23 730.5,511.92 732.81,514.24 752.01,514.24 767.1,529.33 767.1,550.67 752.01,565.76 745.33,565.76 738,573.1 738,574.51 742.5,579.01 742.5,624.99 738,629.49 738,647.77 751.5,661.27 751.5,718.77 740,730.27 740,824.17 1029,1113.17 1029,1309 981,1309 960,1330 v2(965,1330)
  other v1: 774,92
MOT_EN: P4.7 P5.8 U3.40 | length 2596
  Top Layer w10: P5.8@982,81.34 v1(982,145) ; v1(1010,1472) 1010,1465.05 1044.29,1430.76 1029.2,1415.67 1029.2,1394.33 1044.29,1379.24 1065.63,1379.24 1067.47,1381.07 1075.94,1381.07 1078,1379.01 1078,1332.8 1039.71,1294.51 1039.71,1243.48 1020.61,1224.38 1020.61,1207.22 U3.40@1015.16,1201.77 ; v2(1165,1435) 1230,1435 1233.09,1431.91 1303.19,1431.91 1318.28,1416.81 1318.28,1401.72 1516,1204 1516,927.14 1502.74,913.88 1502.74,876.62 1492,865.88 1492,592 1464.62,564.62 1461.81,564.62 1460.67,565.76 1439.13,565.76 1422.9,549.53 1422.9,522.9 1380.5,480.5 1325.75,480.5 1325.51,480.26 1311.67,480.26 1297.91,466.49 1297.91,452.65 1271.4,426.14 1271.4,418.6 v2(1275,415)
  Bottom Layer w10: P4.7@982,81.34 v1(982,145) 1018,181 1191.88,181 1193.88,183 1268,183 1275,190 v2(1275,415) ; v1@1010.31,1471.69 1042.31,1471.69 1079,1435 v2(1165,1435)
NetC12_1: C12.1 U6.6 | length 75.7
  Top Layer w10: U6.6 C12.1@623.86,337.39
NetC12_2: C12.2 U6.5 | length 96.1
  Top Layer w10: U6.5 612.68,311.8 C12.2
NetC13_1: C13.1 U6.2 | length 117.6
  Top Layer w10: C13.1 488.53,202.51 515.34,229.32 542.49,229.32 U6.2
NetC13_2: C13.2 U6.4 | length 202.6
  Top Layer w10: C13.2 429.47,210.47 505.2,286.2 U6.4
NetC14_1: C14.1 U6.7 | length 97.7
  Top Layer w10: U6.7 581.5,362.98 C14.1
NetC15_1: C15.1 U6.3 | length 100.5
  Top Layer w10: U6.3 597.39,260.61 630.47,227.53 C15.1
NetD1_2: D1.2 R3.1 | length 569
  Top Layer w10: D1.2@33.42,364.06 D1.2 61.96,364.06 141.41,443.5 283.11,443.5 308.18,468.57 444.57,468.57 486.29,510.3 489.79,510.3 519.49,540 R3.1
NetD2_2: D2.2 R4.1 | length 609.6
  Top Layer w10: D2.2 173.44,427.5 289.73,427.5 ; 282.5,427.5 289.73,427.5 ; R4.1 611.03,511.5 600.99,511.5 599.79,510.3 512.42,510.3 496.42,494.3 492.92,494.3 451.19,452.57 314.81,452.57 289.73,427.5
NetD3_2: D3.2 R5.1 | length 161.9
  Top Layer w10: R5.1 1715,238.55 1755.29,198.26 1755.29,141.9 1745,131.61 D3.2
NetD4_2: D4.2 R6.1 | length 96
  Top Layer w10: D4.2 1729.53,149.06 R6.1
NetD5_2: D5.2 R7.1 | length 50.9
  Top Layer w10: R7.1 D5.2
NetD6_2: D6.2 R8.1 | length 50.9
  Top Layer w10: R8.1 D6.2
NetD7_2: D7.2 R9.1 | length 50.9
  Top Layer w10: R9.1 D7.2
NetD8_2: D8.2 R10.1 | length 50.9
  Top Layer w10: R10.1 D8.2
NetJ1_1: J1.VBUS U4.7 U4.8 | length 350.3
  Top Layer w10: J1.VBUS 289.45,1080 v2(360,1080) ; v2(435,955) 455.94,975.94 U4.7 U4.8
  Bottom Layer w10: v2(360,1080) 360,975 360.94,975.94 414.06,975.94 v2(435,955)
NetP7_1: P7.1 U6.13 | length 526
  Top Layer w10: v1(268,467) 268,463 279.98,463 301.55,484.57 313.57,484.57 345,516 P7.1 ; U6.13 361.46,286.2 384.26,309 415.74,309 425.74,319 v1(457,319)
  Bottom Layer w10: v1(268,467) 268,463 280,451 338,451 457,332 v1(457,319)
NetP7_2: P7.2 U6.8 | length 347.8
  Top Layer w10: P7.2 386,567.74 386,510 403,493 v1(414,493) ; v1(486.43,388.57) U6.8
  Bottom Layer w10: v1(414,493) 414,482 442,454 441,453 441,434 v1(486.43,388.57)
NetR3_2: R3.2 U7.3 | length 236.8
  Top Layer w10: R3.2 438,572.47 438,668.63 U7.3
NetR4_2: R4.2 U8.3 | length 153.7
  Top Layer w10: U8.3 470.63,627.32 528.25,569.7 548.85,569.7 578.55,540 R4.2
NetR5_2: R5.2 U9.3 | length 109.8
  Top Layer w10: R5.2@1714.37,300.16 U9.3
NetR6_2: R6.2 U10.3 | length 115.8
  Top Layer w10: U10.3 1644.37,201.1 R6.2
NetR7_2: R7.2 U11.3 | length 271.5
  Top Layer w10: U11.3@1594.37,1509.37 1745,1660 1762.47,1660 R7.2
NetR8_2: R8.2 U12.3 | length 461.4
  Top Layer w10: 1602.37,1326 1631.09,1354.72 1631.09,1391.09 1700.19,1460.19 1694.47,1465.92 1694.47,1534.08 1700.92,1540.53 1769.08,1540.53 1774.81,1534.81 1791.47,1551.47 R8.2 ; U12.3 1604.37,1324
NetR9_2: R9.2 U13.3 | length 228.3
  Top Layer w10: R9.2 48.98,1528.47 74.74,1502.71 121.26,1502.71 127.7,1509.15 127.7,1527.07 U13.3
NetR10_2: R10.2 U14.3 | length 351.7
  Top Layer w10: R10.2 98,1538.51 151,1591.51 151,1705.37 176.91,1731.28 176.91,1732.9 194.01,1750 U14.3
NetR11_1: R11.1 U3.41 | length 70.7
  Top Layer w10: U3.41 997.16,1252.63 R11.1
NetR12_2: R12.2 U4.9 | length 60.6
  Top Layer w10: R12.2 520.47,940.35 U4.9
NetU3_31: U3.31 U6.1 | length 2162.4
  Top Layer w10: U6.1 578.8,209.43 602.22,186.01 603.52,186.01 611.74,194.24 658.26,194.24 673.49,179 680.77,179 684.27,182.5 703.73,182.5 707.23,179 760.77,179 766.27,184.5 785.73,184.5 791.23,179 833.92,179 835.92,181 864.08,181 866.08,179 1133.92,179 1135.92,181 1164.08,181 1166.08,179 1229,179 1250,200 v2(1250,210) ; U3.31@1191.18,1148.05 1205.82,1148.05 1216.82,1159.04 1216.82,1167.56 1258.26,1209 1443.12,1209 1465,1187.12 1465,944.02 1454.74,933.76 1454.74,896.51 1444,885.77 1444,719 1380,655 1380,615 1340,575 1340,496.5 1319.13,496.5 1318.88,496.26 1305.05,496.26 1281.91,473.12 1281.91,459.28 1244,421.37 v2(1244,420.77)
  Bottom Layer w10: v2(1244,420.77) 1251.5,413.27 1251.5,383.5 1255,380 1255,210 v2(1250,210)
NetU3_32: U3.32 U6.9 | length 2237.6
  Top Layer w10: U6.9@322.94,387.44 431.93,387.44 460.74,416.25 ; 460.74,416.61 470.69,426.57 502.17,426.57 520.28,408.46 571.61,408.46 602.91,439.76 675,439.76 700.26,414.5 849.73,414.5 858.23,423 898,423 925,450 925,575.19 v1@912.09,588.09 ; U3.32 U3.32@1191.83,1165.64 ; U3.32@1190.68,1164.05 1251.63,1225 1449.75,1225 1481,1193.75 1481,937.39 1470.74,927.13 1470.74,889.88 1460,879.14 1460,705 1420,665 v2(1420,660)
  Bottom Layer w10: v1@913,595 1153,595 ; 1153,595.54 1191.46,634 1270.77,634 1300.27,663.5 1319.73,663.5 1420,665 v2(1420,660)
  other v1: 913,589
NetU3_33: U3.33 U6.11 | length 2480
  Top Layer w10: U6.11 283.02,337.39 277.32,343.09 277.32,396.81 288.01,407.5 429.36,407.5 444.74,422.88 ; 444.74,423.49 487.1,465.85 531.64,465.85 560.09,494.3 606.42,494.3 ; 607.62,495.5 v2(665.79,495.5) ; v2(687,602) 687,578 692,583 793,583 795.5,580.5 v2(850,635) ; U3.33 1156.55,1202 1206,1202 1245,1241 1456.37,1241 1500,1197.37 1500,933.77 1486.74,920.51 1486.74,883.25 1476,872.51 1476,661 v2@1460,645
  Bottom Layer w10: v2(665.79,495.5) 665.5,495.79 665.5,572.21 665.79,572.5 686,577 687,578 v2(687,602) ; v2@792.5,574.5 v2(797,579) ; v2@855,635 889.77,600.23 889.77,599 889.5,598.73 889.5,579.27 903.27,565.5 922.73,565.5 936.23,579 1159.63,579 1180.63,600 1270,600 1310,640 1406.77,640 ; 1410.27,636.5 v2@1446.5,636.5
  other v2: 1450,640
PDI_DATA: P3.1 U3.56 | length 1497.1
  Top Layer w10: v2@635,1205 645,1205 700.19,1149.81 700.19,1024.81 703.5,1021.5 756.51,1021.5 759.51,1024.5 793.02,1024.5 796.36,1027.84 U3.56 ; P3.1 1448.74,1576.26 v1(1461,1576.26)
  Bottom Layer w10: v2(630,1215) 635,1215 635,1241.96 685.5,1292.46 685.5,1326.36 708.64,1349.5 743.76,1349.5 792.98,1398.72 792.98,1415.67 809.21,1431.91 814.53,1431.91 931.5,1548.87 931.5,1549.73 946.77,1565 1157.14,1565 1158.64,1563.5 1191.36,1563.5 1192.86,1565 1287.14,1565 1291.64,1560.5 1445.24,1560.5 v1(1461,1576.26)
PWR/GND_1: P6.2 P9.2 P10.2 P11.2 P12.2 P13.2 P14.2 P15.2 P16.2 | length 1110.1
  Top Layer w30: P6.2 1815,451.25 1764.47,501.77 1764.47,589.47 P12.2 P16.2 P11.2 P15.2 P10.2 P14.2 P9.2 P13.2
PWR/GND_2: P8.2 P9.3 P10.3 P11.3 P12.3 P13.3 P14.3 P15.3 P16.3 | length 1108
  Top Layer w30: P8.2 1877,498 1877,599 1935,657 P16.3 P11.3 P15.3 P10.3 P14.3 P9.3 P13.3
RC_3.3_1: U3.29 U5.1 | length 170.2
  Top Layer w10: U3.29 1192.85,1110.35 1207.49,1110.35 1216.82,1119.67 1216.82,1119.87 1239.95,1143 1325.95,1143 U5.1
RC_3.3_2: U3.28 U5.3 | length 156.2
  Top Layer w10: U3.28 1190.19,1088 1251.45,1088 1251.74,1087.71 1298.26,1087.71 1301.02,1090.47 1304.81,1086.68 1331.09,1086.68 U5.3
RC_3.3_3: U3.27 U5.4 | length 159.4
  Top Layer w10: U3.27 1192.77,1070.9 1207.41,1070.9 1208.52,1072 1244.82,1072 1245.12,1071.71 1294.19,1071.71 1304.81,1061.09 1331.09,1061.09 U5.4
RC_3.3_4: U3.26 U5.5 | length 164.9
  Top Layer w10: U3.26 1192.77,1051.21 1210.36,1051.21 1215.14,1056 1238.2,1056 1238.49,1055.71 1284.6,1055.71 1312.51,1027.8 U5.5
RC_3.3_5: U3.19 U5.6 | length 314.7
  Top Layer w10: U3.19 1192.77,906.05 1211.58,906.05 1216.13,901.5 1268.5,901.5 v1(1270,900) ; U5.6 v1(1398.8,1002.2)
  Bottom Layer w10: v1@1271,901 1297.59,901 v1(1398.8,1002.2)
RC_3.3_6: U3.18 U5.7 | length 345.7
  Top Layer w10: U3.18 1204.95,890.05 1225,870 v1(1225,860) ; U5.7 1346.5,968.91 v1@1396.09,968.91
  Bottom Layer w10: v1@1220,865 1220,860.78 1240,840.78 1260,840.78 v1@1386.22,967
  other v1: 1398,967
RC_3.3_7: U3.17 U5.8 | length 249.9
  Top Layer w10: U3.17 1189.09,868.46 1201.5,856.05 1201.5,850.27 1215.27,836.5 1256.5,836.5 1294.33,874.33 1294.33,932.84 1304.81,943.32 1331.09,943.32 U5.8
RC_3.3_8: U3.16 U5.9 | length 455.1
  Top Layer w10: U3.16 1173.09,854.36 1180.56,854.36 1185.5,849.42 1185.5,843.64 1209.44,819.7 1260.3,819.7 1261.31,818.69 1296.6,853.97 v1(1307.21,853.97) ; U5.9 1346.5,933.13 1372.78,933.13 1379.65,940 1395,940 1415,920 1415,902 1417,900 v1(1425,900)
  Bottom Layer w10: v1(1307.21,853.97) 1307.21,861.21 1329.75,883.75 1396.99,883.75 1415.23,902 1423,902 v1(1425,900)
RC_5_1: P13.1 U5.20 | length 462.6
  Top Layer w10: U5.20 1600.16,1130.16 1647.09,1177.09 1647.09,1372.09 1735,1460 P13.1
RC_5_2: P9.1 U5.18 | length 427.1
  Top Layer w10: U5.18 1569.23,1085 1606.85,1085 1608.69,1083.16 1628.16,1083.16 1648.5,1103.5 1648.5,1155.87 1663.09,1170.46 1663.09,1338.5 1693.5,1338.5 P9.1
RC_5_3: P14.1 U5.17 | length 294.8
  Top Layer w10: U5.17 1570.91,1061.09 1597.19,1061.09 1599.1,1063 1633,1063 1664.5,1094.5 1664.5,1149.25 1679.09,1163.83 1679.09,1234.5 P14.1@1709.5,1234.5
RC_5_4: P10.1 U5.16 | length 218.3
  Top Layer w10: U5.16 1570.91,1035.5 1597.19,1035.5 1608.69,1047 1642,1047 P10.1
RC_5_5: P15.1 U5.15 | length 190
  Top Layer w10: U5.15 1570.91,1009.91 1597.19,1009.91 1607.67,1020.39 1607.67,1023.35 1615.32,1031 1724,1031 P15.1
RC_5_6: P11.1 U5.14 | length 258.8
  Top Layer w10: U5.14 1591.61,976.61 1630,1015 1660,1015 1735,940 P11.1
RC_5_7: P16.1 U5.13 | length 298.9
  Top Layer w10: U5.13 1599.48,951.02 1616.74,933.76 1677.24,933.76 1694.47,916.53 1694.47,865.92 1735,825.39 P16.1
RC_5_8: P12.1 U5.12 | length 452.3
  Top Layer w10: U5.12 1555.5,917.73 1529.22,917.73 1518.74,907.25 1518.74,892.43 1529.22,881.95 1529.22,880.48 1509,860.26 1509,806.2 1547.55,767.65 1627.35,767.65 P12.1
RESET: P3.2 U3.57 | length 1472.2
  Top Layer w10: v1(615.02,1179.02) 684.19,1109.85 684.19,1015.81 695.97,1004.03 764.49,1004.03 ; 766.96,1006.5 819.89,1006.5 U3.57@823.23,1009.84
  Bottom Layer w10: v1(615.02,1179.02) 605,1189 605,1245 669.5,1309.5 669.5,1332.99 715.75,1379.24 750.87,1379.24 770,1398.37 770,1415.32 802.58,1447.91 807.91,1447.91 915.5,1555.5 915.5,1556.36 942.14,1583 1161.77,1583 1165.27,1579.5 1184.73,1579.5 1186.23,1581 1293.77,1581 1298.27,1576.5 1409.5,1576.5 1448.74,1615.74 P3.2
SCK: P4.5 P5.6 U3.43 | length 2131.9
  Top Layer w10: 915.28,1300.28 900.5,1315.06 900.5,1355.5 930,1385 v1@930,1434 ; 917,1298 921.3,1293.7 934.85,1293.7 941.29,1287.26 941.29,1260.86 957.79,1244.37 U3.43 ; P5.6@932,81.34 v1(932,145)
  Bottom Layer w10: 756,736.89 767.5,725.39 767.5,638.73 758.5,629.73 758.5,581.9 783.1,557.3 783.1,522.7 754.5,494.1 754.5,477.27 756,475.77 756,435.01 750,429.01 750,261.29 799.43,211.86 799.43,189.69 813.4,175.72 830.63,175.72 835.92,181 869,181 884,166 884,153.61 892.61,145 v1(932,145) P4.5@932,70.34 ; 759,739.89 759,820.54 1067,1128.54 1067,1356 1018.78,1404.22 1018.78,1424.22 978,1465 946,1465 v1@922.5,1441.5
  other v1: 927,1437
SONAR_RX: P2.1 U3.38 | length 849.3
  Top Layer w10: P2.1 918.26,1655 959.26,1696 1150.7,1696 1174.72,1671.98 1174.72,1638.02 1110,1573.3 1110,1503.86 1120.5,1493.36 1120.5,1460.64 1110,1450.14 1110,1431.65 1112.72,1428.93 1112.72,1420.46 1107.94,1415.67 1107.94,1394.33 1112.72,1389.54 1112.72,1320.35 1080.07,1287.7 1078.15,1287.7 1071.71,1281.26 1071.71,1234.74 1078.15,1228.3 1078.15,1227.82 1069.3,1227.82 1059.98,1218.49 1059.98,1203.77 U3.38@1057.98,1201.77
SONAR_TX: P2.2 U3.39 | length 535.4
  Top Layer w10: P2.2 976.24,1614.99 1104.5,1486.73 1104.5,1467.27 1091.94,1454.7 1091.94,1387.7 1094,1385.64 1094,1326.18 1055.71,1287.88 1055.71,1236.85 1040.29,1221.43 1040.29,1203.85 U3.39@1038.29,1201.85
SS0: P4.2 P5.1 U3.6 | length 736.8
  Top Layer w10: P5.1@832,248.66 v1(832,310) 832,368.46 868.54,405 912.2,405 950,442.8 950,670.35 977.52,697.86 977.52,706.45 985,713.94 985,739.29 970,754.29 970,765.84 969.66,766.17 969.66,775.4 958,787.06 U3.6@958,824
  Bottom Layer w10: P4.2@832,248.66 v1(832,310)
SS1: P4.4 P5.3 U3.7 | length 713.8
  Top Layer w10: P5.3@882,248.66 v1(882,310) 882,352 1005,475 1005,602.11 1005,680.92 995.52,690.41 995.52,699 1001,704.48 1001,748.75 991.03,758.72 991.03,770.26 987.66,773.63 987.66,782.86 979.5,791.02 979.5,810.02 979.24,810.28 979.24,820.49 977,822.72 U3.7@977,834
  Bottom Layer w10: P4.4@882,248.66 v1(882,310)
SS2: P4.6 P5.5 U3.8 | length 700.2
  Top Layer w10: P5.5@932,248.66 v1(932,310) 932,360 1025,453 1025,683.55 1015.26,693.29 1017,695.03 1017,758.21 1009.03,766.17 1009.03,777.72 1005.66,781.09 1005.66,790.31 998.92,797.05 998.92,834.08 U3.8@997,836
  Bottom Layer w10: P4.6@932,248.66 v1(932,310)
SS3: P4.8 P5.7 U3.9 | length 730.3
  Top Layer w10: P5.7@982,248.66 v1(982,310) 982,383 1090,491 1090,617.01 1041,666.01 1041,690.18 1033,698.18 1033,767.66 1027.03,773.63 1027.03,785.17 1023.66,788.54 1023.66,797.77 1017,804.43 U3.9@1017,837
  Bottom Layer w10: v1@978,312 v1@982,308 ; P4.8@982,248.66 v1@982,308 ; v1(982,310) v1@982,308
SS4: P4.10 P5.9 U3.10 | length 708
  Top Layer w10: v1(1032,310) 1032,248.66 P5.9@1035,251.66 ; v1@1035,313 1035,332.63 1106,403.63 1106,624.03 1057,673.03 1057,696.81 1049,704.81 1049,777.12 1045.03,781.09 1045.03,792.63 1041.66,796 1041.66,805.22 1036.53,810.36 U3.10
  Bottom Layer w10: P4.10@1032,248.66 v1(1032,310)
SS5: P4.12 P5.11 U3.11 | length 741.4
  Top Layer w10: U3.11@1056,835.91 1056,816.34 1059.66,812.68 1059.66,803.45 1063.03,800.08 1063.03,788.54 1065,786.57 1065,711.43 1073,703.43 1073,679.66 1170,582.66 1170,578.11 1164,572.11 1164,505.61 1175,494.61 1175,452.88 1162,439.88 1162,437 1082,357 v1(1082,310) P5.11@1082,248.66
  Bottom Layer w10: P4.12@1082,248.66 v1(1082,310)
SS6: P4.14 P5.13 U3.12 | length 729
  Top Layer w10: U3.12@1075,835.91 1076.5,834.41 1076.5,821.3 1077.66,820.14 1077.66,810.91 1081.03,807.54 1081.03,796 1083,794.03 1083,745.12 1089,739.12 1089,686.29 1191,584.29 1191,576.48 1180,565.48 1180,512.24 1191,501.24 1191,446.25 1178,433.25 1178,423.25 1154.5,399.75 1154.5,387.25 1130,362.75 v1@1130,312 ; P5.13@1132,248.66 v1(1132,310)
  Bottom Layer w10: P4.14@1132,248.66 v1(1132,310)
SS7: P4.16 P5.15 U3.13 | length 740.5
  Top Layer w10: U3.13@1095,833 1096.5,831.5 1096.5,817.53 1099,815.03 1099,751.75 1111.5,739.25 1111.5,686.41 1207,590.91 1207,580.73 1221.97,565.76 1224.45,565.76 1239.54,550.67 1239.54,529.33 1224.45,514.24 1224.25,514.24 1207,496.98 1207,439.63 1194,426.63 1194,416.63 1170.5,393.13 1170.5,343.5 1182,332 v1(1182,310) P5.15@1182,248.66
  Bottom Layer w10: P4.16@1182,248.66 v1(1182,310)
USB_RX: U3.22 U4.26 | length 1465.4
  Top Layer w10: v1(529,1166.69) 532.19,1163.5 536.5,1163.5 536.5,1160.27 540.32,1156.45 U4.26 ; v2(652,734) 666.1,734 666.5,734.4 665,735.9 715.9,735.9 720,740 848,740 867,721 867,712 871,708 v1(873,708) ; U3.22 1189.09,966.91 1190.98,965.02 1207.49,965.02 1217,955.52 1217,945 1227,935 v1(1227,925)
  Bottom Layer w10: v1(529,1166.69) 525.69,1170 526.77,1170 550.27,1193.5 569.73,1193.5 583.5,1179.73 583.5,1112.19 670,1025.69 670,970.86 665.5,966.36 665.5,919.67 670,915.17 670,867.31 660,857.31 660,742 v2(652,734) ; v1(873,708) 871,708 867,712 870,715 870,711 877,711 883,717 931.94,717 949.44,699.5 970.56,699.5 985.5,714.44 985.5,779.02 979.5,785.02 979.5,802.5 1102,925 v1(1227,925)
USB_TX: U3.23 U4.25 | length 2282.8
  Top Layer w10: U4.25 v1(560,1170) ; v1(649,650) 665,650 665.29,649.71 665.29,613.53 663.5,611.73 663.5,592.27 665.29,590.47 665.29,589.53 662.5,586.73 662.5,566.05 665.29,563.26 665.29,538.47 709.77,494 778,494 v2(783,489) ; U3.23 1217.28,988.47 v1(1227.87,977.87)
  Bottom Layer w10: v1(560,1170) 560,755 649,666 v1(649,650) ; v2(783,489) 781,491 808.14,491 829.64,512.5 1227.76,512.5 1261.26,479 1287.79,479 1305.79,497 1336.2,497 1352.29,513.09 1380.79,513.09 1395.88,528.19 1408.19,528.19 1424.24,544.24 1424.24,550.67 1439.33,565.76 1445.76,565.76 1480,600 1480,695 1376.5,798.5 1253.27,798.5 1201.5,850.27 1201.5,869.73 1233.27,901.5 1236.73,901.5 1250.5,915.27 1250.5,934.73 1230,955.23 v1@1230,975.75
USB_VDD: C16.1 U4.6 | length 174.5
  Top Layer w10: C16.1 464.53,892.24 411.5,945.27 411.5,966.5 440.63,995.63 U4.6
VBAT: D1.1 D2.1 D3.1 D4.1 D5.1 D6.1 D7.1 D8.1 P4.13 P5.14 R2.2 U1.1 U2.1 | length 7077.8
  Top Layer w10: D7.1 D8.1 98,1699.47 v1(137.53,1739) ; D1.1 D2.1 128,323 v1(159,323) ; v1@370,1770 576,1770 584,1762 v1(789,1762) ; v2@600,640 654.5,694.5 765.5,694.5 793,667 v1@793,647 ; R2.2@800.53,782 v1(827,782) ; v2@840,445 842.5,447.5 853.73,447.5 869.5,463.27 869.5,482.73 845.84,506.39 845.84,587.39 841.5,591.73 841.77,592 v2(844,592) ; v1(901,1762) 1919,1762 1960.53,1720.47 D5.1 D6.1 ; 1232.23,235 v4(1435,235) ; v2(1629.53,40.47) D4.1 ; D4.1@1678.76,40.47 D4.1 ; D3.1 D4.1
  Top Layer w30: 1217,139 1339,139 v4(1435,235) 1480.55,280.55 U1.1 ; v4(1435,425) 1435,455 1495,515 1529.8,515 1567.05,552.25 U2.1
  Bottom Layer w10: v1(137.53,1739) 194.53,1682 ; v1(159,323) 193,357 193,478 245.77,478 258.27,490.5 277.73,490.5 281.73,486.5 377.06,486.5 390.5,499.94 ; 223,917.26 223,779 261,741 456,741 456,548 ; 223,945.52 223,1090.48 ; 223.05,917.3 223.05,945.47 ; 223.05,1090.53 223.05,1125.95 194.53,1154.47 194.53,1682 ; v1@369,1769 281.53,1769 194.53,1682 ; 390.5,502.73 435.77,548 456,548 ; v2@590,630 508,548 456,548 ; v1(789,1762) v1(901,1762) ; v1@794,654 832,692 v1@832,771 ; v1@794.5,647.5 v2@845,597 ; 835.3,450 835.3,446.07 820.73,431.5 816.8,431.5 790.3,405 781,405 767.5,391.5 767.5,327.5 785,310 798.77,310 822.27,333.5 1191.73,333.5 1205.5,319.73 1205.5,261.73 v4(1221.23,246) ; v4(1435,235) v2(1629.53,40.47)
  Bottom Layer w30: v3(1110,125) 1125,110 P4.13 ; v4(1435,235) v4(1435,425)
  other v1: 794,647 369,1770
  other v2: 840,438 600,630
VBAT_SENSE: R1.2 R2.1 U3.62 | length 192.6
  Top Layer w10: R1.2 727.94,768.47 R2.1 787,889.29 805.68,907.97 823.15,907.97 U3.62
XBEE_RX: *.2 P1.1 U3.48 | length 1641.2
  Top Layer w10: v2(685,1395) 692.5,1387.5 703.36,1387.5 746,1344.86 v2(746,1279) 747.5,1280.5 792.36,1280.5 830.71,1242.15 830.71,1240.74 837.15,1234.3 849.7,1234.3 859.36,1224.64 U3.48 ; v2(689,548) 694.5,553.5 695.73,553.5 709.23,567 765.87,567 789.37,543.5 816.58,543.5 *.2
  Bottom Layer w10: P1.1 425,1643.77 619.27,1449.5 630.5,1449.5 v2(685,1395) ; v2(689,548) 682,548 689.53,555.53 689.85,555.53 703,568.68 703,584.77 710.5,592.27 710.5,611.73 688.5,633.73 688.5,700.54 692,704.04 692,844.05 731.3,883.35 731.3,955.21 729.5,957.01 729.5,1011.27 763.38,1045.15 763.38,1046.38 739.81,1069.96 739.81,1219.33 736.5,1222.64 736.5,1265.64 746,1275.14 v2(746,1279)
XBEE_TX: *.3 P1.2 U3.49 | length 1530.6
  Top Layer w10: v2(629,1473) 629,1439.23 661.5,1406.73 661.5,1385.27 675.27,1371.5 696.73,1371.5 722.5,1345.73 722.5,1269.27 736.27,1255.5 757.27,1255.5 766.27,1264.5 785.73,1264.5 799.5,1250.73 799.5,1238.72 v2(808,1230.22) ; v2@728,670 v2(782,616) ; v2@813.3,1235.52 824.91,1223.91 824.91,1221.32 837.5,1208.73 837.5,1189.27 824.91,1176.68 U3.49
  Bottom Layer w10: P1.2 503.74,1598.26 v2(629,1473) ; 724,723.64 724,830.8 763.3,870.1 763.3,968.47 ; v2@727,672 727,720.64 ; 761.5,970.27 761.5,998.01 814.5,1051.01 814.5,1084.36 789.68,1109.18 789.68,1211.9 v2(808,1230.22) ; v2@786,620 799.37,620 818.5,600.87 818.5,590.73 ; 820.5,588.73 820.5,579.5 837,563 875.82,563 *.3
  other v2: 728,671
pads on no net: *.4 *.5 *.6 *.7 *.8 *.9 *.11 *.12 *.13 *.14 *.15 *.16 *.17 *.18 *.19. *.20 J1.ID J1.MH P4.0 P4.9 P4.11 P5.10 P5.12 U3.1 U3.20 U3.21 U3.30 U3.36 U3.37 U3.46 U3.47 U3.58 U3.59 U3.63 U3.64 U3.65 U4.1 U4.2 U4.10 U4.11 U4.12 U4.13 U4.14 U4.15 U4.16 U4.17 U4.18 U4.19 U4.20 U4.21 U4.22 U4.23 U4.24 U4.27 U4.28 U4.29 U6.10
copper on no net: | length 8814.4
  Top Layer w10: 580.91,1453.91 36,1453.91 36,1354 581,1354 581,1454 ; 794,100243 1691,99346 ; 5799,99166 12055,99166

## Polygon pours and split planes (outlines as drawn)
VBAT on Top Layer "vbat_conn" (solid): 1255,90 1250,95 1250,200 1105,200 1100,195 1100,90
GND on Bottom Layer "Bottom Layer-No Net" (solid, pour order 1000): 0,2000 2000,2000 2000,0 0,0

## Other copper
Top Layer:
  text "Falcon FC" at 55,1375 h60
  text "FCU.2" at 226.61,1289 h40

## Silkscreen, mask and mechanical layers (free items; w line width, h text height)
Top Overlay:
  text "XBEE" at 403,1847 h80
  text "SONR" at 872,1845 h80
  text "PROG" at 1346,1845 h80
  text "DC3G" at 1343,1719 h80
  text "TR3G" at 401,1714 h80
  text "TR3G" at 868,1711 h80
  text "XBEE" at 503,1529 h20
  text "SONAR" at 974,1528 h20
  text "PDI" at 1478,1526 h20
  text "RS232" at 476,569 h20 r90
  text "5V" at 1680,515 h40
  text "232" at 161,505 h80 r90
  text "RTG" at 289,505 h80 r90
  text "GND" at 1822,230 h40
Top Solder:
  lines w10: 580.91,1453.91 36,1453.91 36,1354 581,1354 581,1454
  text "Falcon FC" at 55,1375 h60
  text "FCU.2" at 226.61,1289 h40